# EAGLE board Exhibit_Jumping Ring Schematic (EAGLE 7.3.0)

Size 318.75 x 221.54 mm. Coordinates in mm from the lower left corner, seen from the top.
Outline: 158.75,121.54 318.75,121.54 318.75,221.54 158.75,221.54 158.75,121.54
Copper layers (1*16): Top 0.035mm / dielectric 1.5mm / Bottom 0.035mm
Design rules "default": minimum track width 10mil, minimum drill 24mil, track to track 8mil, track to pad 8mil, pad to pad 8mil, via to via 8mil, smd to smd 8mil, copper to edge 40mil, drill to drill 8mil, minimum pad ring 10mil, minimum via ring 8mil, stop-mask expansion 4mil, vias tented up to drill 0mil, thermal gap 10mil

## Footprints (pad centres in the part's own frame; a part is rotated, then mirrored left to right if it is on the bottom)
WMZT-1P = drill 0.8 square: IN 0,3.81 | drill 0.8: OUT 0,-5.08
WMZT-2P = drill 3.2 pad 6.452 square: PIN_1 -5.08,6.35; PIN_2 5.08,6.35 | drill 3.2 pad 6.452: POUT_1 -5.08,-5.08; POUT_2 5.08,-5.08
C5B2.5 = drill 0.813 pad 1.6 octagon: 1 -2.54,0; 2 2.54,0
INDUCTOR-PADS = drill 1.3 pad 2.54 square: P1 0,3.81 | drill 1.3 pad 2.54: P2 0,-3.81
DS-01 = drill 0.813 long: 1 0,-3.81; 2 0,3.81
0204/7 = drill 0.813 pad 1.676 octagon: 1 -3.81,0; 2 3.81,0
SOP04 = smd 0.8 x 1.2: 1 -1.27,-3; 2 1.27,-3; 3 1.27,3; 4 -1.27,3
TRINKET5V = drill 0.8 square: 0 7.62,2.54; 1 7.62,0; 2 7.62,-2.54; 3 -5.08,-2.54; 4 -5.08,0; 5V 7.62,-5.08; BAT+ -5.08,5.08; GND -5.08,2.54; RST -5.08,-5.08; USB+ 7.62,5.08
AC-SOURCE = drill 1.5 pad 3.81 square: GND 0,-6.35 | drill 1.5 pad 3.81: LINE 0,6.35; NEUTRAL 0,0

## Placement (x,y rotation side)
BREAKER-CIRCUIT[25A]  WMZT1C25  [WMZT-1P]  40.64,23.75 0 top
BREAKER-COIL-AB[10A]  WMZT2C10  [WMZT-2P]  59.69,26.29 0 top
C1  0.033uF  [C5B2.5]  81.28,25.02 0 top
C2  0.033uF  [C5B2.5]  81.28,19.94 0 top
INDUCTOR-COIL-A  [INDUCTOR-PADS]  29.21,22.48 0 top
INDUCTOR-COIL-B  [INDUCTOR-PADS]  20.32,4.7 0 top
PUSHBUTTON  [DS-01]  -5.08,2.16 0 top  (outside the outline)
R1  620  [0204/7]  101.6,33.91 0 top
R2  620  [0204/7]  101.6,30.1 0 top
R_BLEED1  2M  [0204/7]  116.84,195.2 0 top
R_BLEED2  2M  [0204/7]  101.6,37.72 0 top
R_BUT  10K  [0204/7]  5.08,-4.19 0 top  (outside the outline)
SSR1  AD-SSR810-DC-48Z  [SOP04]  100.33,107.57 0 top
SSR2  AD-SSR810-DC-48Z  [SOP04]  100.33,98.68 0 top
U$1  TRINKET5V  [TRINKET5V]  6.35,14.86 0 top
U$2  AC-SOURCE  [AC-SOURCE]  35.56,25.02 0 top

## Library data of the parts
BREAKER-CIRCUIT[25A] = WMZT-1P
BREAKER-COIL-AB[10A] = WMZT-2P
C1 C2 = capacitor-wima
INDUCTOR-COIL-A INDUCTOR-COIL-B = IRON-CORE-INDUCTOR-COIL
PUSHBUTTON = switch-dil; OC_FARNELL: unknown; OC_NEWARK: unknown
R1 R2 R_BLEED1 R_BLEED2 R_BUT = adafruit
SSR1 SSR2 = relay; OC_FARNELL: unknown; OC_NEWARK: unknown
U$1 = Trinket
U$2 = AC-SOURCE

## Nets
5V: U$1.BAT+
GND: R_BUT.2 U$1.GND
N$1: PUSHBUTTON.1 R_BUT.1 U$1.1
N$2: BREAKER-CIRCUIT[25A].IN U$2.LINE
N$3: C1.1 C2.1 R_BLEED1.1 R_BLEED2.1 SSR1.3 SSR2.4
N$4: BREAKER-COIL-AB[10A].PIN_1 INDUCTOR-COIL-A.P2
N$5: BREAKER-COIL-AB[10A].PIN_2 INDUCTOR-COIL-B.P2
N$6: C1.2 R1.1
N$7: BREAKER-COIL-AB[10A].POUT_2 R2.2 R_BLEED2.2 SSR2.3
N$8: PUSHBUTTON.2 U$1.5V
N$9: BREAKER-COIL-AB[10A].POUT_1 R1.2 R_BLEED1.2 SSR1.4
N$10: C2.2 R2.1
N$13: INDUCTOR-COIL-A.P1 INDUCTOR-COIL-B.P1 U$2.NEUTRAL
SSR1_NEG: SSR1.2
SSR1_POS: SSR1.1 U$1.0
SSR2_NEG: SSR2.2
SSR2_POS: SSR2.1 U$1.2

## Tracks (layer width: path | path; a pad name or v marks a point on that pad's centre or on a via)
GND  (1 unrouted)
N$1  (2 unrouted)
N$2  (1 unrouted)
N$3  (5 unrouted)
N$4  (1 unrouted)
N$5  (1 unrouted)
N$6  (1 unrouted)
N$7  (3 unrouted)
N$8  (1 unrouted)
N$9  (3 unrouted)
N$10  (1 unrouted)
N$13  (2 unrouted)
SSR1_POS  (1 unrouted)
SSR2_POS  (1 unrouted)